# Altium PCB PCB1.PcbDoc (part 2 of 2)
Units mil, origin at the board's own origin, x right, y up, seen from the top; angles counter-clockwise.
Board outline 6000 x 4000 mil, 4 copper layers (Top Layer, Layer 1, Layer 2, Bottom Layer), stack 23.756 mil thick; 294 components, 275 nets, 1509 pads, 24 vias.
Unrouted connection lines stored in the file: 1089.
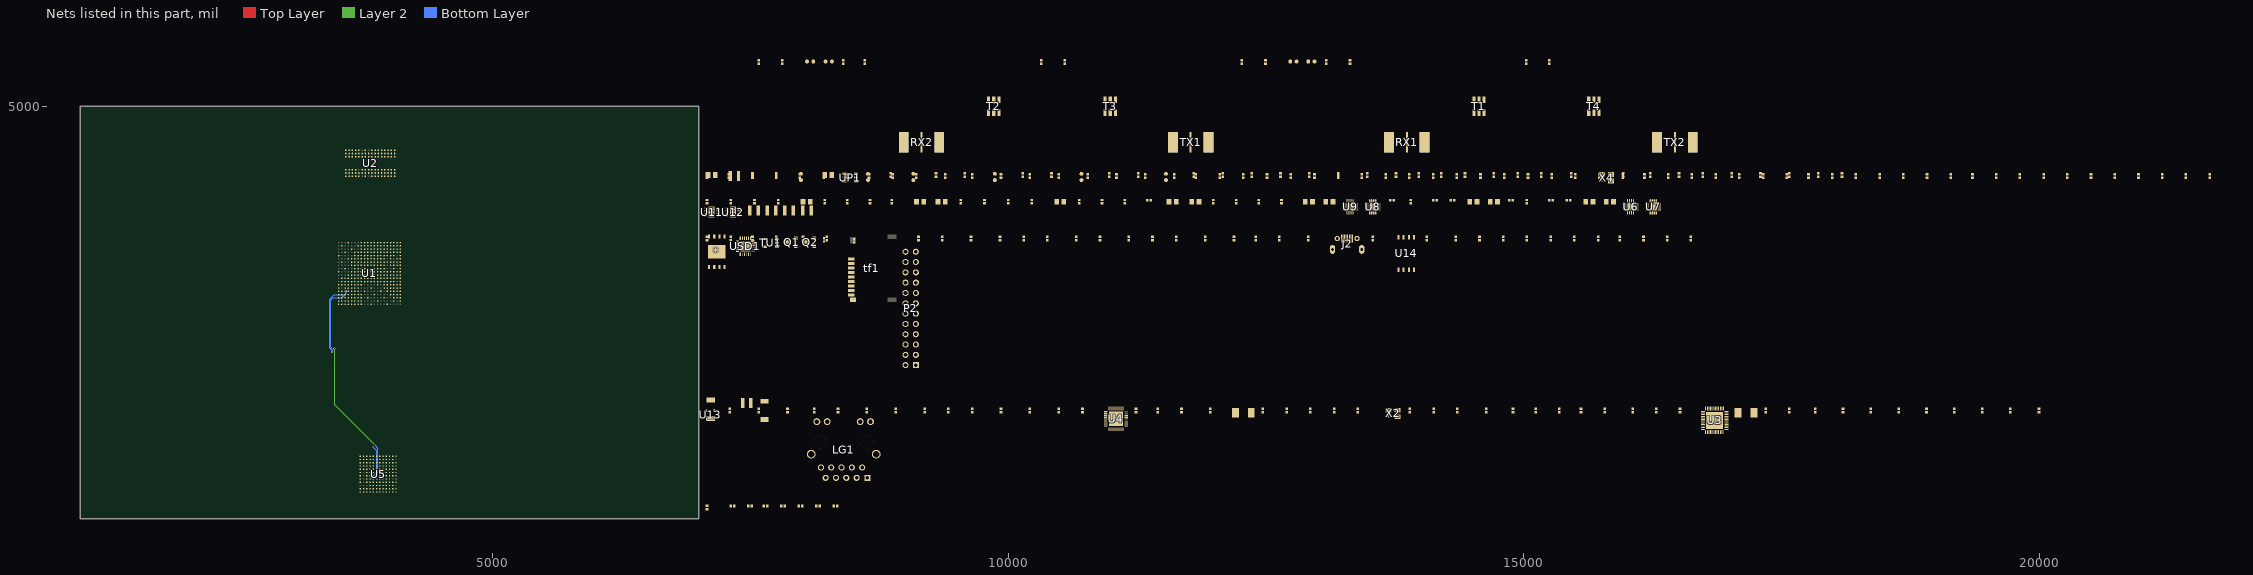
[diagram p3: the nets of this part, all layers, seen from the top]

## Part data
C1: library part CAP, "Capacitor"
C2 C3 C4 C5 C6 C7 C8 C9 C10 C11 C12 C13 C17 C18 C19 C20 C21 C22 C23 C24 C25 C26 C27 C28 C33 C34 C35 C36 C37 C38 C39 C41 C42 C43 C44 C45 C46 C49 C50 C51 C52 C53 C54 C55 C56 C57 C61 C62 C67 C68 C69 C70 C71 C72 C73 C74 C75 C76 C77 C78 C80 C81 C82 C83 C84 C85 C86 C87 C89 C90 C91 C92 C93 C94 C95 C96 C98 C99 C100 C101 C102 C103 C104 C105 C106 C107 C108: library part CAP_3, "Capacitor"
C14 C15 C16 C29 C30 C31 C32 C40 C47 C48 C117 C118 C122 C123 C145 C146 C150 C151 C152 C162 C165 C166 C168 C169 C170 C171 C172 C173 C174 C175 C176 C177 CP1 CP3: library part CAP_1, "Capacitor"
C58 C59 C60 C63 C109 C110 C111 C112 C113 C114 C115 C116 C119 C120 C121 C124 C125 C126 C127 C128 C129 C130 C131 C132 C133 C134 C135 C136 C137 C138 C139 C140 C141 C142 C143 C144 CP2: library part CAP_2, "Capacitor"
DONE USR_LED: library part LED0, "Typical INFRARED GaAs LED", LatestRevisionDate=08-Jul-2005, LatestRevisionNote="Mech Layer 1 removed.", PackageDescription="LED; 2 Leads", PackageReference=LED-0, Published=8-Jun-2000, Publisher="Altium Limited"
L1 L2 L3 L4 L6: library part INDUCTANCE_1, "Inductance"
L5 L7 L8 L9 LP1: library part INDUCTANCE, "Inductance"
LG1: BOM_Manufacturer=HANRUN, BOM_Manufacturer Part=HR911130C, BOM_Supplier=LCSC, BOM_Supplier Part=C50933, Contributor=LCSC, nameAlias=Value, spicePre=L, spiceSymbolName=HR911130C
P2: "Header, 12-Pin, Dual row", LatestRevisionDate=17-Jul-2002, LatestRevisionNote="Re-released for DXP Platform.", Publisher="Altium Limited"
Q1 Q2: PSpiceTemplate="X^@REFDES %d %g %s @MODEL"
R1 R2 R3 R4 R5 R6 R7 R8 R9 R10 R11 R12 R13 R14 R15 R16 R17 R18 R19 R20 R21 R22 R24 R25 R26 R27 R28 R29 R30 R31 R32 R33 R34 R35 R36 R37 R38 R39 R40 R41 R42 R43 R44 R45 R46 R47 R48 R49 R50 R51 R52 R53 R54 R55 R56 R57 R58 R59 R60 R61 R62 R63 R64 R65 R66 R67 R68 R69 R70 R71 R72: library part RES, "Resistor"
R73 R74 R75 RP1 RP2 RX4 RX5 RX6 RX7 RX8 RX10 RX13 RX14 RX15 RX22: library part RES_1, "Resistor"
RESET USR_BTN: "Switch", LatestRevisionDate=17-Jul-2002, LatestRevisionNote="Re-released for DXP Platform.", PackageDescription="Switch; 2 Leads", PackageReference=SPST-2, Published=24-Mar-1999, Publisher="Altium Limited"
U2: library part DDR3
U14: library part N25Q12-F8, "Serial Flash Memory, 16Mbit, Low Voltage, 50MHz SPI Bus Interface", Manufacturer=Spansion
X1 X3: library part XTAL-2, "Crystal"
X2 X4: library part XTAL-4, "Oscillator"

## Via types
v1: diameter 19.68, hole 11.81, Top Layer to Bottom Layer, 16 vias
v2: diameter 17.72, hole 7.87, Top Layer to Bottom Layer, tented both sides, 8 vias

## Nets (pads, with @x,y where several pads share a name; then routed paths per layer and width w, separated by ;. In a path a pad name is that pad's centre, name@x,y a point inside that pad or via, vN(x,y) a via of type N, cw(c..) or ccw(c..) an arc to the next point about the centre after c; other vN are vias at no path point)
1P3_TX: C58.1 C59.2 C60.1 C63.2 L5.1 L7.1 L8.1 L9.1 U5.A7 U5.A8 U5.A9 U5.A10
AD9361_CLKOUT: U1.W18 U5.J6
AD9361_RST: RX4.1 U1.R19 U5.K5
ADVDD10: C124.1 C125.1 C126.1 C127.2 C128.2 C130.2 C131.2 L6.2 U3.3 U3.9 U3.28 U3.36 U3.40
CB: *.6 R58.1 U14.6
CTRL_IN0: U5.C5
CTRL_IN1: U5.C6
CTRL_IN2: U5.D6
CTRL_IN3: U5.D5
CTRL_OUT0: U1.R16 U5.D4
CTRL_OUT1: U1.R17 U5.E4
CTRL_OUT2: U1.T17 U5.E5
CTRL_OUT3: U1.R18 U5.E6 | length 355.5
  Top Layer w5: v2(3827.76,1402.24) U5.E6@3843.51,1417.99
  Bottom Layer w5: v2(3827.76,1402.24) 3877.68,1452.16 3877.68,1661.82 v2(3840.21,1699.28)
CTRL_OUT4: U1.V17 U5.F6 | length 2120.4
  Top Layer w4: v2@3859.25,1402.24 U5.F6@3875,1417.99
  Top Layer w5: v2@3554.56,3159.56 U1.V17@3570.04,3175.04
  Layer 2 w10: v2(3468.48,2650.68) 3468.48,2108.02 v2(3857.68,1718.82)
  Bottom Layer w4: v2@3855.68,1716.82 3888.68,1683.82 3888.68,1433.82 3859.76,1404.9 v2(3859.76,1402.25)
  Bottom Layer w5: v2(3468.48,2650.68) 3441.48,2650.68 3428.98,2663.18 3428.98,2858.68 3430.48,2860.18 3430.48,3120.68 3452.54,3142.74 3537.92,3142.74 v2(3554.56,3159.38)
CTRL_OUT5: U1.U15 U5.F5 | length 760.4
  Top Layer w5: v2@3586.06,3222.55 U1.U15@3601.54,3238.03
  Bottom Layer w5: v2(3444.62,2618.68) 3443.98,2619.32 3443.98,2632.18 3420.48,2655.68 3420.48,3129.68 3465.48,3174.68 3561.48,3174.68 3586.06,3199.25 v2(3586.06,3222.37)
CTRL_OUT6: U1.T19 U5.F4
CTRL_OUT7: U1.V18 U5.G4
DATA_CLK_N: U1.U19 U5.H11
DATA_CLK_P: U1.U18 U5.G11
DDR3_A0: U1.N2 U2.N3
DDR3_A1: U1.K2 U2.P7
DDR3_A2: U1.M3 U2.P3
DDR3_A3: U1.K3 U2.N2
DDR3_A4: U1.M4 U2.P8
DDR3_A5: U1.L1 U2.P2
DDR3_A6: U1.L4 U2.R8
DDR3_A7: U1.K4 U2.R2
DDR3_A8: U1.K1 U2.T8
DDR3_A9: U1.J4 U2.R3
DDR3_A10: U1.F5 U2.L7
DDR3_A11: U1.G4 U2.R7
DDR3_A12: U1.E4 U2.N7
DDR3_A13: U1.D4 U2.T3
DDR3_A14: U1.F4 U2.T7
DDR3_BA0: U1.L5 U2.M2
DDR3_BA1: U1.R4 U2.N8
DDR3_BA2: U1.J5 U2.M3
DDR3_CAS: U1.P5 U2.K3
DDR3_CK_N: R20.2 U1.M2 U2.K7
DDR3_CK_P: R20.1 U1.L2 U2.J7
DDR3_CKE: U1.N3 U2.K9
DDR3_CS: U1.N1 U2.L2
DDR3_DM0: U1.A1 U2.E7
DDR3_DM1: U1.F1 U2.D3
DDR3_DQ0: U1.C3 U2.E3
DDR3_DQ1: U1.B3 U2.F7
DDR3_DQ2: U1.A2 U2.F2
DDR3_DQ3: U1.A4 U2.F8
DDR3_DQ4: U1.D3 U2.H3
DDR3_DQ5: U1.D1 U2.H8
DDR3_DQ6: U1.C1 U2.G2
DDR3_DQ7: U1.E1 U2.H7
DDR3_DQ8: U1.E2 U2.D7
DDR3_DQ9: U1.E3 U2.C3
DDR3_DQ10: U1.G3 U2.C8
DDR3_DQ11: U1.H3 U2.C2
DDR3_DQ12: U1.J3 U2.A7
DDR3_DQ13: U1.H2 U2.A2
DDR3_DQ14: U1.H1 U2.B8
DDR3_DQ15: U1.J1 U2.A3
DDR3_DQS0_N: U1.B2 U2.G3
DDR3_DQS0_P: U1.C2 U2.F3
DDR3_DQS1_N: U1.F2 U2.B7
DDR3_DQS1_P: U1.G2 U2.C7
DDR3_ODT: U1.N5 U2.K1
DDR3_RAS: U1.P4 U2.J3
DDR3_RESET: R1.1 U1.B4 U2.T2
DDR3_VREF: C1.1 R4.1 R5.2 U1.H6 U1.P6 U2.H1 U2.M8
DDR3_WE: U1.M5 U2.L3
EN_AGC: U1.W19 U5.G5
ENABLE: U1.V15 U5.G6
ETH_MDC: U1.C10 U3.30
ETH_MDIO: R34.2 U1.C11 U3.31
ETH_RXCK: U1.B17 U3.19
ETH_RXCTL: R36.2 U1.D13 U3.13
ETH_RXD0: R41.1 U1.D11 U3.14
ETH_RXD1: R39.1 U1.A16 U3.16
ETH_RXD2: R43.1 U1.F15 U3.17
ETH_RXD3: R45.1 U1.A15 U3.18
ETH_TXCK: U1.A19 U3.22
ETH_TXCTL: U1.F14 U3.27
ETH_TXD0: U1.E14 U3.23
ETH_TXD1: U1.B18 U3.24
ETH_TXD2: U1.D10 U3.25
ETH_TXD3: U1.A17 U3.26
FB_CLK_N: RX22.2 U1.U17 U5.G10
FB_CLK_P: U1.T16 U5.F10
FPGA_DONE: Q1.1 U1.R11
FPGA_TCK: P2.10 U1.F9
FPGA_TDI: P2.8 U1.G6
FPGA_TDO: P2.7 U1.F6
FPGA_TMS: P2.9 U1.J6
GND: *.4 *.9 C1.2 C2.1 C3.1 C4.1 C5.1 C6.1 C7.1 C8.1 C9.1 C10.1 C11.1 C12.1 C13.1 C33.1 C34.1 C35.1 C36.1 C37.1 C38.1 C39.1 C41.1 C42.1 C43.1 C44.1 C45.1 C46.1 C49.1 C50.1 C51.1 C52.1 C53.1 C54.1 C55.1 C56.1 C57.1 C61.1 C62.1 C67.1 C68.1 C69.1 C70.1 C71.1 C72.1 C73.1 C74.1 C75.1 C76.1 C77.1 C78.1 C80.1 C81.2 C82.1 C83.1 C84.1 C85.1 C86.1 C87.1 C89.1 C90.1 C91.1 C92.1 C93.1 C94.1 C95.1 C96.1 C98.2 C99.2 C100.2 C101.2 C102.2 C103.2 C104.2 C105.2 C106.2 C107.2 C108.2 C109.1 C110.1 C111.2 C112.2 C113.1 C114.1 C115.1 C116.1 C117.2 C118.2 C119.1 C120.2 C121.1 C122.2 C123.2 C124.2 C125.2 C126.2 C127.1 C128.1 C129.2 C130.1 C131.1 C132.2 C133.2 C134.2 C135.2 C136.2 C137.2 C138.2 C139.2 C140.1 C141.2 J2.5 J2.6 J2.7 J2.8 J2.9 LG1.12 LG1.P10 LG1.SHIELD0 LG1.SHIELD1 P2.3 P2.5 P2.18 P2.19 P2.20 P2.21 P2.22 P2.23 P2.24 Q1.2 Q2.2 R1.2 R2.1 R5.1 R6.2 R11.2 R12.2 R17.2 R18.2 R26.2 R28.2 R36.1 R40.1 R44.2 R49.1 R51.1 R53.1 R54.2 R56.1 R62.1 R65.2 R69.2 RESET.1 RX6.2 RX7.2 RX8.2 RX13.2 RX14.2 RX15.2 tf1.6 tf1.10 TU1.2 U1.A8 U1.A18 U1.B1 U1.B11 U1.C4 U1.C9 U1.C14 U1.D17 U1.E10 U1.E20 U1.F3 U1.F7 U1.F10 U1.G10 U1.G12 U1.G16 U1.H7 U1.H9 U1.H11 U1.H13 U1.H19 U1.J2 U1.J8 U1.J10 U1.J12 U1.K5 U1.K7 U1.K10 U1.K11 U1.K13 U1.K15 U1.L8 U1.L9 U1.L12 U1.L18 U1.M1 U1.M7 U1.M9 U1.M10 U1.M11 U1.M13 U1.N4 U1.N8 U1.N10 U1.N12 U1.N14 U1.P7 U1.P9 U1.P11 U1.P13 U1.P17 U1.R8 U1.R12 U1.R20 U1.T3 U1.T7 U1.T13 U1.U6 U1.U16 U1.V9 U1.V19 U1.W2 U1.W12 U1.Y5 U1.Y15 U2.A9 U2.B1 U2.B3 U2.B9 U2.D1 U2.D8 U2.E1 U2.E2 U2.E8 U2.F9 U2.G1 U2.G8 U2.G9 U2.J2 U2.J8 U2.M1 U2.M9 U2.P1 U2.P9 U2.T1 U2.T9 U3.0 U3.47 U4.0 U6.6 U6.7 U6.8 U6.15 U6.16 U6.20 U7.6 U7.7 U7.8 U7.15 U7.16 U7.20 U8.6 U8.7 U8.8 U8.15 U8.16 U8.20 U9.6 U9.7 U9.8 U9.15 U9.16 U9.20 U13.1 U14.4 USD1.2 USD1.11 USD1.25 USR_BTN.1 X2.2
NetC6_2: C6.2 U6.9
NetC7_2: C7.2 U7.9
NetC11_2: C11.2 U8.9
NetC13_2: C13.2 U9.9
NetC19_1: C19.1 R21.2 R24.1 U11.3
NetC24_1: C24.1 R22.2 R25.1 U12.3
NetC27_2: C27.2 U11.6
NetC28_2: C28.2 U12.6
NetC111_1: C111.1 C112.1 LG1.P1
NetC117_1: C117.1 U3.43 X1.1
NetC118_1: C118.1 U3.42 X1.2
NetC119_2: C119.2 R28.1 R29.1 U1.E11
NetC122_1: C122.1 U4.26 X3.1
NetC123_1: C123.1 U4.25 X3.2
NetC129_1: C129.1 U4.20
NetC135_1: C135.1 C136.1 R64.1
NetC142_1: C142.1 R73.2
NetC145_2: C145.2 R74.1
NetC146_2: C146.2 R73.1 U5.G2 U5.G3
NetC150_2: C150.2 C152.1 U5.M12
NetC151_2: C151.2 R74.2 U5.A11 U5.B11
NetC152_2: C152.2 X4.3
NetCP2_2: CP2.2 RP1.1 RP2.2 UP1.6
NetDONE_2: DONE.2 R61.2
NetL1_1: L1.1 U6.1 U6.2 U6.3
NetL2_1: L2.1 U7.1 U7.2 U7.3
NetL3_1: L3.1 U8.1 U8.2 U8.3
NetL4_1: L4.1 U9.1 U9.2 U9.3
NetLG1_11: LG1.11 R32.2
NetLG1_13: LG1.13 R31.2
NetLP1_1: LP1.1 UP1.3
NetP2_2: P2.2 R52.1 R54.1
NetP2_4: P2.4 R48.2 R50.1
NetQ1_3: Q1.3 R61.1
NetQ2_3: Q2.3 R60.1
NetR2_2: R2.2 U1.H5
NetR3_2: R3.2 U1.G5
NetR6_1: R6.1 U2.L8
NetR9_2: R9.2 R11.1 U6.5
NetR10_2: R10.2 R12.1 U7.5
NetR14_2: R14.2 R17.1 U8.5
NetR15_2: R15.2 U9.4
NetR16_2: R16.2 R18.1 U9.5
NetR26_1: R26.1 U3.39
NetR27_1: R27.1 U3.32
NetR30_2: R30.2 U1.B10
NetR37_2: R37.2 X2.3
NetR38_2: R38.2 U3.20
NetR42_2: R42.2 U4.1
NetR44_1: R44.1 U4.24
NetR55_2: R55.2 U1.R10
NetR57_2: R57.2 U1.L6
NetR60_2: R60.2 USR_LED.2
NetR62_2: R62.2 USD1.24
NetR63_2: R63.2 tf1.3 USD1.20
NetR67_2: R67.2 TU1.1
NetR68_1: R68.1 TU1.3
NetR70_1: R70.1 tf1.9
NetR72_1: R72.1 USD1.9
NetR75_1: R75.1 U5.L4
NetRESET_2: RESET.2 U13.3
NetRX1_1: RX1.1 T1.3
NetRX2_1: RX2.1 T2.3
NetT3_3: T3.3 TX1.1
NetT4_3: T4.3 TX2.1
Nettf1_1: tf1.1 USD1.23
Nettf1_2: tf1.2 USD1.22
Nettf1_5: tf1.5 USD1.19
Nettf1_7: tf1.7 USD1.18
Nettf1_8: tf1.8 USD1.16
OTG_CLK: R42.1 U1.A11
OTG_DATA0: U1.A14 U4.3
OTG_DATA1: U1.D15 U4.4
OTG_DATA2: U1.A12 U4.5
OTG_DATA3: U1.F12 U4.6
OTG_DATA4: U1.C16 U4.7
OTG_DATA5: U1.A10 U4.9
OTG_DATA6: U1.E13 U4.10
OTG_DATA7: U1.C18 U4.13
OTG_DIR: U1.C13 U4.31
OTG_NXT: U1.E16 U4.2
OTG_RESETN: C121.2 R33.1 U1.D16 U4.27
OTG_STP: U1.C15 U4.29
PG_1V0: R7.2 U6.4 U7.13
PG_1V5: R13.2 U8.4 U9.13
PG_1V8: R8.2 U7.4 U8.13
PHY_AD0/LED0: R31.1 R46.2 U3.35
PHY_AD1/LED1: R32.1 R40.2 U3.34
PHY_MDI0_N: LG1.P3 U3.2
PHY_MDI0_P: LG1.P2 U3.1
PHY_MDI1_N: LG1.P7 U3.5
PHY_MDI1_P: LG1.P4 U3.4
PHY_MDI2_N: LG1.P6 U3.8
PHY_MDI2_P: LG1.P5 U3.7
PHY_MDI3_N: LG1.P9 U3.11
PHY_MDI3_P: LG1.P8 U3.10
PMEB: R35.2 U3.33
PS_CLK_500: R37.1 U1.E7
PS_MIO7: R56.2 U1.D8
PS_MIO8: R47.2 U1.D5
PS_PRO_B: U1.C7 U3.29 U13.2
QSPI_CS: *.1 R59.1 U1.A7 U14.1
QSPI_D0: *.5 R49.2 U1.B8 U14.5
QSPI_D1: *.2 R51.2 U1.D6 U14.2
QSPI_D2: *.3 R52.2 U1.B7 U14.3
QSPI_D3: *.7 R50.2 U1.A6 U14.7
QSPI_SCK: R53.2 R58.2 U1.A5
REG_OUT: L6.1 U3.48
RFGND: C14.2 C15.2 C17.1 C18.1 C20.1 C21.1 C22.1 C23.1 C25.1 C26.1 C27.1 C28.1 C58.2 C59.1 C60.2 C63.1 C142.2 C143.1 C144.1 C145.1 C146.1 C150.1 C151.1 C162.2 C165.2 C166.2 C168.2 C169.2 C170.2 C171.2 C172.2 C173.2 C174.2 C175.2 C176.2 C177.2 CP1.1 CP3.1 R24.2 R25.2 R75.2 RP1.2 RX1.2 RX1.3 RX1.4 RX1.5 RX2.2 RX2.3 RX2.4 RX2.5 RX5.1 RX6.1 RX7.1 RX8.1 RX10.1 RX13.1 RX14.1 RX15.1 RX22.1 T1.1 T1.2 T1.5 T2.1 T2.2 T2.5 T3.1 T3.2 T3.5 T4.1 T4.2 T4.5 TX1.2 TX1.3 TX1.4 TX1.5 TX2.2 TX2.3 TX2.4 TX2.5 U5.A1 U5.A2 U5.A4 U5.A5 U5.A6 U5.A12 U5.B1 U5.B2 U5.B12 U5.C1 U5.C2 U5.C7 U5.C8 U5.C9 U5.C10 U5.C11 U5.C12 U5.D1 U5.D12 U5.E1 U5.F1 U5.F3 U5.F7 U5.F9 U5.F11 U5.G1 U5.G12 U5.H2 U5.H3 U5.H5 U5.H6 U5.H7 U5.H10 U5.J2 U5.K1 U5.K2 U5.K12 U5.L1 U5.L2 U5.L3 U5.L7 U5.L8 U5.L9 U5.L10 U5.L11 U5.L12 U5.M4 U5.M5 U5.M6 U11.0 U11.4 U12.0 U12.4 UP1.2 X4.2
  other v1: 7112.2,3936.61 7137.8,3936.61 7317.2,3936.61 7342.8,3936.61 7112.2,3962.2 7137.8,3962.2 7317.2,3962.2 7342.8,3962.2 7112.2,3987.8 7137.8,3987.8 7317.2,3987.8 7342.8,3987.8 7112.2,4013.39 7137.8,4013.39 7317.2,4013.39 7342.8,4013.39
RX1A_N: C16.2 U5.M2
RX1A_P: C30.2 U5.M1
RX1AN_N: C16.1 T1.6
RX1AN_P: C30.1 T1.4
RX1B_N: C29.2 U5.J1
RX1B_P: C31.2 U5.H1
RX1BN_N: C29.1 T2.6
RX1BN_P: C31.1 T2.4
RX_D0_N: U1.P20 U5.K11
RX_D0_P: U1.N20 U5.J12
RX_D1_N: U1.W20 U5.K10
RX_D1_P: U1.V20 U5.J11
RX_D2_N: U1.U20 U5.K9
RX_D2_P: U1.T20 U5.J10
RX_D3_N: U1.P19 U5.K8
RX_D3_P: U1.N18 U5.J9
RX_D4_N: U1.T15 U5.K7
RX_D4_P: U1.T14 U5.J8
RX_D5_N: U1.R14 U5.J7
RX_D5_P: U1.P14 U5.H8
RX_FRAME_N: U1.V13 U5.G7
RX_FRAME_P: U1.U13 U5.G8
SD_CD: R70.2 R71.1 U1.B14
SD_CLK: R72.2 U1.D14
SD_CMD: U1.C17 USD1.4
SD_D0: U1.E12 USD1.6
SD_D1: U1.A9 USD1.7
SD_D2: U1.F13 USD1.1
SD_D3: U1.B15 USD1.3
SPI_CLK: U1.P18 U5.J5
SPI_DI: U1.P15 U5.J4
SPI_DO: U1.P16 U5.L6
SPI_ENB: U1.N17 U5.K6
TEST/ENABLE: RX5.2 U5.C4
TX1A_N: C48.1 L9.2 U5.M8
TX1A_P: C40.1 L8.2 U5.M7
TX1B_N: C47.1 L7.2 U5.M10
TX1B_P: C32.1 L5.2 U5.M9
TX1BN_N: C47.2 C48.2 T3.6 T4.6
TX1BN_P: C32.2 C40.2 T3.4 T4.4
TX_D0_N: U1.T10 U5.E7
TX_D0_P: U1.T11 U5.F8
TX_D1_N: U1.Y17 U5.D7
TX_D1_P: U1.Y16 U5.E8
TX_D2_N: U1.U12 U5.D8
TX_D2_P: U1.T12 U5.E9
TX_D3_N: U1.Y19 U5.D9
TX_D3_P: U1.Y18 U5.E10
TX_D4_N: U1.W13 U5.D10
TX_D4_P: U1.V12 U5.E11
TX_D5_N: U1.Y14 U5.D11
TX_D5_P: U1.W14 U5.E12
TX_FRAME_N: RX10.2 U1.W16 U5.H9
TX_FRAME_P: U1.V16 U5.G9
TXNRX: U1.U14 U5.H4
UART_RX: P2.11 U1.C12
UART_TX: P2.12 U1.B12
USB2_5V: C137.1 J2.1 P2.15 R64.2 R66.1 R67.1
USB_ID: J2.4 U4.23
USB_OTG_N: J2.2 P2.16 U4.19
USB_OTG_P: J2.3 P2.17 U4.18
USB_VBUS: R66.2 U4.22
USR_BTN: R19.2 U1.C5 USR_BTN.2
USR_LED: Q2.1 R65.1 U1.C8
VCC1P8: C143.2 C144.2 CP2.1 CP3.2 LP1.2 RP2.1 U5.H12 X4.4
VCC_1V0: C2.2 C33.2 C34.2 C35.2 C36.2 C37.2 C39.2 C49.2 C50.2 C51.2 C52.2 C53.2 C54.2 C55.2 C56.2 C57.2 C67.2 L1.2 R7.1 R9.1 U1.G7 U1.G11 U1.G13 U1.H10 U1.H12 U1.J7 U1.J13 U1.K12 U1.L7 U1.L13 U1.M12 U1.N7 U1.N13 U1.P8 U1.P12 U1.R7 U1.R13 U6.14
VCC_1V5: C8.2 C38.2 C81.1 C86.2 C98.1 C99.1 C100.1 C101.1 C102.1 C103.1 C104.1 C105.1 C106.1 C107.1 C108.1 L3.2 R3.1 R4.2 R13.1 R14.1 U1.A3 U1.D2 U1.E5 U1.G1 U1.H4 U1.L3 U1.P2 U1.R5 U1.U1 U1.V4 U2.A1 U2.A8 U2.B2 U2.C1 U2.C9 U2.D2 U2.D9 U2.E9 U2.F1 U2.G7 U2.H2 U2.H9 U2.K2 U2.K8 U2.N1 U2.N9 U2.R1 U2.R9 U8.14
VCC_1V8: C3.2 C41.2 C42.2 C43.2 C44.2 C45.2 C46.2 C68.2 C69.2 C70.2 C71.2 C72.2 C73.2 C74.2 C80.2 C82.2 C83.2 C84.2 C85.2 C90.2 C91.2 C92.2 C93.2 C94.2 C95.2 C96.2 C109.2 C110.2 C141.1 L2.2 R8.1 R10.1 R29.2 R30.1 R33.2 R34.1 R39.2 R41.2 R43.2 R45.2 R71.2 U1.A13 U1.B16 U1.C19 U1.D12 U1.E15 U1.F8 U1.F11 U1.F18 U1.G8 U1.G9 U1.H8 U1.H14 U1.J9 U1.J11 U1.J17 U1.K8 U1.K20 U1.L11 U1.M8 U1.M16 U1.N9 U1.N11 U1.N19 U1.P10 U1.R9 U1.R15 U1.T8 U1.T18 U1.U11 U1.V14 U1.W7 U1.W17 U1.Y10 U1.Y20 U3.15 U3.21 U4.8 U4.11 U4.14 U4.28 U4.30 U4.32 U7.14 USD1.5
VCC_3V3: *.8 C9.2 C20.2 C21.2 C25.2 C26.2 C61.2 C62.2 C75.2 C76.2 C77.2 C78.2 C87.2 C89.2 C113.2 C114.2 C115.2 C116.2 C120.1 C132.1 C133.1 C134.1 C138.1 C139.1 CP1.2 DONE.1 L4.2 LG1.14 P2.1 P2.6 R15.1 R16.1 R19.1 R27.2 R35.1 R38.1 R46.1 R47.1 R48.1 R55.1 R57.1 R59.2 R63.1 R68.2 tf1.4 U1.B6 U1.D7 U1.K6 U1.M6 U1.N6 U1.R6 U1.T6 U3.6 U3.37 U3.38 U3.41 U3.44 U3.45 U4.21 U9.14 U11.5 U11.7 U11.8 U12.5 U12.7 U12.8 U13.4 U14.8 UP1.1 UP1.4 USD1.17 USD1.21 USR_LED.1 X2.1 X2.4
VCC_IN: C4.2 C5.2 C10.2 C12.2 C140.2 P2.13 P2.14 TU1.5 U6.10 U6.11 U6.12 U6.13 U7.10 U7.11 U7.12 U8.10 U8.11 U8.12 U9.10 U9.11 U9.12
VDD_DIG: C14.1 C15.1 C22.2 C23.2 C24.2 C162.1 C172.1 C173.1 C176.1 C177.1 R22.1 RX4.2 U5.B8 U5.D2 U5.D3 U5.E3 U5.F12 U5.K4 U12.1 U12.2
VDDA_RX_LO: C17.2 C18.2 C19.2 C165.1 C166.1 C168.1 C169.1 C170.1 C171.1 C174.1 C175.1 R21.1 U5.B9 U5.B10 U5.E2 U5.F2 U5.J3 U5.K3 U11.1 U11.2
VUSB_V_EN: R69.1 TU1.4 U4.17
pads on no net: LG1. tf1.0 tf1.11 tf1.12 U1.A20 U1.B5 U1.B9 U1.B13 U1.B19 U1.B20 U1.C6 U1.C20 U1.D9 U1.D18 U1.D19 U1.D20 U1.E6 U1.E8 U1.E9 U1.E17 U1.E18 U1.E19 U1.F16 U1.F17 U1.F19 U1.F20 U1.G14 U1.G15 U1.G17 U1.G18 U1.G19 U1.G20 U1.H15 U1.H16 U1.H17 U1.H18 U1.H20 U1.J14 U1.J15 U1.J16 U1.J18 U1.J19 U1.J20 U1.K9 U1.K14 U1.K16 U1.K17 U1.K18 U1.K19 U1.L10 U1.L14 U1.L15 U1.L16 U1.L17 U1.L19 U1.L20 U1.M14 U1.M15 U1.M17 U1.M18 U1.M19 U1.M20 U1.N15 U1.N16 U1.P1 U1.P3 U1.R1 U1.R2 U1.R3 U1.T1 U1.T2 U1.T4 U1.T5 U1.T9 U1.U2 U1.U3 U1.U4 U1.U5 U1.U7 U1.U8 U1.U9 U1.U10 U1.V1 U1.V2 U1.V3 U1.V5 U1.V6 U1.V7 U1.V8 U1.V10 U1.V11 U1.W1 U1.W3 U1.W4 U1.W5 U1.W6 U1.W8 U1.W9 U1.W10 U1.W11 U1.W15 U1.Y1 U1.Y2 U1.Y3 U1.Y4 U1.Y6 U1.Y7 U1.Y8 U1.Y9 U1.Y11 U1.Y12 U1.Y13 U2.J1 U2.J9 U2.L1 U2.L9 U2.M7 U3.12 U3.46 U4.12 U4.15 U4.16 U5.A3 U5.B3 U5.B4 U5.B5 U5.B6 U5.B7 U5.C3 U5.L5 U5.M3 U5.M11 UP1.5 USD1.8 USD1.10 USD1.12 USD1.13 USD1.14 USD1.15 X4.1

## Text inside footprints (layer, text, board x,y; h text height)
DONE: Top Overlay "+" at 8267,3639.14 h30 r90
P2: Top Overlay "1" at 9145,2390 h50 r90; Top Overlay "13" at 9025,2350 h50 r90; Top Overlay "12" at 9125,3650 h50 r90; Top Overlay "24" at 9025,3650 h50 r90
RX1: Mechanical 37 "2" at 13708.15,4659.52 h30 r90; Mechanical 37 "3" at 13708.15,4659.52 h30 r90; Mechanical 37 "4" at 14048.67,4664.74 h30 r90; Mechanical 37 "5" at 14048.67,4664.74 h30 r90; Mechanical 37 "1" at 13877.67,4663.27 h30 r90; Mechanical 39 "200X95B" at 14281.67,4774.5 h30 r90; Mechanical 39 "200X95" at 14221.67,4758.5 h30 r90; Mechanical 39 "200X90" at 14161.67,4758.5 h30 r90; Mechanical 39 "CNSMARAL687W375H171" at 13551.67,4966.5 h30 r90; Top Component Outline "ADI/JRBL" at 13865,4582.03 h30 r180; Top Component Outline "25JUL16" at 13865,4609.63 h30 r180; Top Component Outline "QA/RGS" at 13865,5377.24 h30 r180; Top Component Outline "26JUL16" at 13865,5429.64 h30 r180; Mechanical 43 "PCB EDGE" at 14225,5136.5 h30 r90; Top Assembly "UPN" at 13865,4759.9 h30 r180; Top Assembly "N/A" at 13865,4720.5 h30 r180
RX2: Mechanical 37 "2" at 9003.15,4659.52 h30 r90; Mechanical 37 "3" at 9003.15,4659.52 h30 r90; Mechanical 37 "4" at 9343.67,4664.74 h30 r90; Mechanical 37 "5" at 9343.67,4664.74 h30 r90; Mechanical 37 "1" at 9172.67,4663.27 h30 r90; Mechanical 39 "200X95B" at 9576.67,4774.5 h30 r90; Mechanical 39 "200X95" at 9516.67,4758.5 h30 r90; Mechanical 39 "200X90" at 9456.67,4758.5 h30 r90; Mechanical 39 "CNSMARAL687W375H171" at 8846.67,4966.5 h30 r90; Top Component Outline "ADI/JRBL" at 9160,4582.03 h30 r180; Top Component Outline "25JUL16" at 9160,4609.63 h30 r180; Top Component Outline "QA/RGS" at 9160,5377.24 h30 r180; Top Component Outline "26JUL16" at 9160,5429.64 h30 r180; Mechanical 43 "PCB EDGE" at 9520,5136.5 h30 r90; Top Assembly "UPN" at 9160,4759.9 h30 r180; Top Assembly "N/A" at 9160,4720.5 h30 r180
T1: Mechanical 37 "3" at 14615,5072.5 h30; Mechanical 37 "6" at 14515,4947.5 h30; Mechanical 37 "4" at 14615,4947.5 h30; Mechanical 37 "1" at 14515,5072.51 h30; Mechanical 37 "5" at 14565,4947.51 h30; Mechanical 37 "2" at 14564.99,5072.51 h30; Mechanical 39 "30X65" at 14565,4905.02 h30; Mechanical 39 "TSML150W160H160" at 14565,5440 h30; Top Component Outline "ADI/JSM" at 14365,5086.81 h30 r90; Top Component Outline "04SEP12" at 14414.99,5086.81 h30 r90; Top Component Outline "QA/REP" at 14739.99,5074.41 h30 r90; Top Component Outline "04SEP12" at 14790,5086.81 h30 r90; Top Assembly "N/A" at 14615,5030.01 h30 r90; Top Assembly "UPN" at 14639.99,5030.01 h30 r90
T2: Mechanical 37 "3" at 9910,5072.5 h30; Mechanical 37 "6" at 9810,4947.5 h30; Mechanical 37 "4" at 9910,4947.5 h30; Mechanical 37 "1" at 9810,5072.51 h30; Mechanical 37 "5" at 9860,4947.51 h30; Mechanical 37 "2" at 9859.99,5072.51 h30; Mechanical 39 "30X65" at 9860,4905.02 h30; Mechanical 39 "TSML150W160H160" at 9860,5440 h30; Top Component Outline "ADI/JSM" at 9660,5086.81 h30 r90; Top Component Outline "04SEP12" at 9709.99,5086.81 h30 r90; Top Component Outline "QA/REP" at 10034.99,5074.41 h30 r90; Top Component Outline "04SEP12" at 10085,5086.81 h30 r90; Top Assembly "N/A" at 9910,5030.01 h30 r90; Top Assembly "UPN" at 9934.99,5030.01 h30 r90
T3: Mechanical 37 "3" at 11040,5072.5 h30; Mechanical 37 "6" at 10940,4947.5 h30; Mechanical 37 "4" at 11040,4947.5 h30; Mechanical 37 "1" at 10940,5072.51 h30; Mechanical 37 "5" at 10990,4947.51 h30; Mechanical 37 "2" at 10989.99,5072.51 h30; Mechanical 39 "30X65" at 10990,4905.02 h30; Mechanical 39 "TSML150W160H160" at 10990,5440 h30; Top Component Outline "ADI/JSM" at 10790,5086.81 h30 r90; Top Component Outline "04SEP12" at 10839.99,5086.81 h30 r90; Top Component Outline "QA/REP" at 11164.99,5074.41 h30 r90; Top Component Outline "04SEP12" at 11215,5086.81 h30 r90; Top Assembly "N/A" at 11040,5030.01 h30 r90; Top Assembly "UPN" at 11064.99,5030.01 h30 r90
T4: Mechanical 37 "3" at 15730,5072.5 h30; Mechanical 37 "6" at 15630,4947.5 h30; Mechanical 37 "4" at 15730,4947.5 h30; Mechanical 37 "1" at 15630,5072.51 h30; Mechanical 37 "5" at 15680,4947.51 h30; Mechanical 37 "2" at 15679.99,5072.51 h30; Mechanical 39 "30X65" at 15680,4905.02 h30; Mechanical 39 "TSML150W160H160" at 15680,5440 h30; Top Component Outline "ADI/JSM" at 15480,5086.81 h30 r90; Top Component Outline "04SEP12" at 15529.99,5086.81 h30 r90; Top Component Outline "QA/REP" at 15854.99,5074.41 h30 r90; Top Component Outline "04SEP12" at 15905,5086.81 h30 r90; Top Assembly "N/A" at 15730,5030.01 h30 r90; Top Assembly "UPN" at 15754.99,5030.01 h30 r90
TX1: Mechanical 37 "2" at 11613.15,4659.52 h30 r90; Mechanical 37 "3" at 11613.15,4659.52 h30 r90; Mechanical 37 "4" at 11953.67,4664.74 h30 r90; Mechanical 37 "5" at 11953.67,4664.74 h30 r90; Mechanical 37 "1" at 11782.67,4663.27 h30 r90; Mechanical 39 "200X95B" at 12186.67,4774.5 h30 r90; Mechanical 39 "200X95" at 12126.67,4758.5 h30 r90; Mechanical 39 "200X90" at 12066.67,4758.5 h30 r90; Mechanical 39 "CNSMARAL687W375H171" at 11456.67,4966.5 h30 r90; Top Component Outline "ADI/JRBL" at 11770,4582.03 h30 r180; Top Component Outline "25JUL16" at 11770,4609.63 h30 r180; Top Component Outline "QA/RGS" at 11770,5377.24 h30 r180; Top Component Outline "26JUL16" at 11770,5429.64 h30 r180; Mechanical 43 "PCB EDGE" at 12130,5136.5 h30 r90; Top Assembly "UPN" at 11770,4759.9 h30 r180; Top Assembly "N/A" at 11770,4720.5 h30 r180
TX2: Mechanical 37 "2" at 16308.15,4659.52 h30 r90; Mechanical 37 "3" at 16308.15,4659.52 h30 r90; Mechanical 37 "4" at 16648.67,4664.74 h30 r90; Mechanical 37 "5" at 16648.67,4664.74 h30 r90; Mechanical 37 "1" at 16477.67,4663.27 h30 r90; Mechanical 39 "200X95B" at 16881.67,4774.5 h30 r90; Mechanical 39 "200X95" at 16821.67,4758.5 h30 r90; Mechanical 39 "200X90" at 16761.67,4758.5 h30 r90; Mechanical 39 "CNSMARAL687W375H171" at 16151.67,4966.5 h30 r90; Top Component Outline "ADI/JRBL" at 16465,4582.03 h30 r180; Top Component Outline "25JUL16" at 16465,4609.63 h30 r180; Top Component Outline "QA/RGS" at 16465,5377.24 h30 r180; Top Component Outline "26JUL16" at 16465,5429.64 h30 r180; Mechanical 43 "PCB EDGE" at 16825,5136.5 h30 r90; Top Assembly "UPN" at 16465,4759.9 h30 r180; Top Assembly "N/A" at 16465,4720.5 h30 r180
U5: Top Overlay "A" at 3710.03,1214.52 h30 r270; Top Overlay "1" at 3665.03,1250.52 h30
U6: Bottom Component Center "7" at 16101.9,4034.3 h30; Bottom Component Center "8" at 16101.9,4054 h30; Bottom Component Center "6" at 16101.9,4014.7 h30; Bottom Component Center "5" at 16101.9,3995 h30; Bottom Component Center "13" at 15994.5,4054 h30; Bottom Component Center "10" at 16062.4,4082.6 h30; Bottom Component Center "11" at 16042.8,4082.6 h30; Bottom Component Center "12" at 16023.1,4082.6 h30; Bottom Component Center "14" at 15994.5,4034.3 h30; Bottom Component Center "9" at 16073.3,4082.6 h30; Bottom Component Center "4" at 16073.3,3966.4 h30; Bottom Component Center "3" at 16053.6,3966.4 h30; Bottom Component Center "2" at 16034,3966.4 h30; Bottom Component Center "1" at 16014.3,3966.4 h30; Bottom Component Center "20" at 16052.6,4024.5 h30; Bottom Component Center "15" at 15994.5,4014.7 h30; Bottom Component Center "16" at 15994.5,3995 h30
U7: Bottom Component Center "7" at 16321.9,4034.3 h30; Bottom Component Center "8" at 16321.9,4054 h30; Bottom Component Center "6" at 16321.9,4014.7 h30; Bottom Component Center "5" at 16321.9,3995 h30; Bottom Component Center "13" at 16214.5,4054 h30; Bottom Component Center "10" at 16282.4,4082.6 h30; Bottom Component Center "11" at 16262.8,4082.6 h30; Bottom Component Center "12" at 16243.1,4082.6 h30; Bottom Component Center "14" at 16214.5,4034.3 h30; Bottom Component Center "9" at 16293.3,4082.6 h30; Bottom Component Center "4" at 16293.3,3966.4 h30; Bottom Component Center "3" at 16273.6,3966.4 h30; Bottom Component Center "2" at 16254,3966.4 h30; Bottom Component Center "1" at 16234.3,3966.4 h30; Bottom Component Center "20" at 16272.6,4024.5 h30; Bottom Component Center "15" at 16214.5,4014.7 h30; Bottom Component Center "16" at 16214.5,3995 h30
U8: Bottom Component Center "7" at 13601.9,4034.3 h30; Bottom Component Center "8" at 13601.9,4054 h30; Bottom Component Center "6" at 13601.9,4014.7 h30; Bottom Component Center "5" at 13601.9,3995 h30; Bottom Component Center "13" at 13494.5,4054 h30; Bottom Component Center "10" at 13562.4,4082.6 h30; Bottom Component Center "11" at 13542.8,4082.6 h30; Bottom Component Center "12" at 13523.1,4082.6 h30; Bottom Component Center "14" at 13494.5,4034.3 h30; Bottom Component Center "9" at 13573.3,4082.6 h30; Bottom Component Center "4" at 13573.3,3966.4 h30; Bottom Component Center "3" at 13553.6,3966.4 h30; Bottom Component Center "2" at 13534,3966.4 h30; Bottom Component Center "1" at 13514.3,3966.4 h30; Bottom Component Center "20" at 13552.6,4024.5 h30; Bottom Component Center "15" at 13494.5,4014.7 h30; Bottom Component Center "16" at 13494.5,3995 h30
U9: Bottom Component Center "7" at 13381.9,4034.3 h30; Bottom Component Center "8" at 13381.9,4054 h30; Bottom Component Center "6" at 13381.9,4014.7 h30; Bottom Component Center "5" at 13381.9,3995 h30; Bottom Component Center "13" at 13274.5,4054 h30; Bottom Component Center "10" at 13342.4,4082.6 h30; Bottom Component Center "11" at 13322.8,4082.6 h30; Bottom Component Center "12" at 13303.1,4082.6 h30; Bottom Component Center "14" at 13274.5,4034.3 h30; Bottom Component Center "9" at 13353.3,4082.6 h30; Bottom Component Center "4" at 13353.3,3966.4 h30; Bottom Component Center "3" at 13333.6,3966.4 h30; Bottom Component Center "2" at 13314,3966.4 h30; Bottom Component Center "1" at 13294.3,3966.4 h30; Bottom Component Center "20" at 13332.6,4024.5 h30; Bottom Component Center "15" at 13274.5,4014.7 h30; Bottom Component Center "16" at 13274.5,3995 h30
U13: Bottom Component Center "2" at 7149,1977.5 h30; Bottom Component Center "1" at 7074,1977.5 h30; Bottom Component Center "4" at 7074,2060.1 h30; Bottom Component Center "3" at 7149,2060.1 h30
U14: Bottom Component Center "5" at 13935,3739.95 h30 r90; Bottom Component Center "2" at 13835,3424.95 h30 r90; Bottom Component Center "1" at 13785,3424.95 h30 r90; Bottom Component Center "4" at 13935,3424.95 h30 r90; Bottom Component Center "8" at 13785,3739.95 h30 r90; Bottom Component Center "7" at 13835,3739.95 h30 r90; Bottom Component Center "3" at 13885,3424.95 h30 r90; Bottom Component Center "6" at 13885,3739.95 h30 r90
USR_LED: Top Overlay "+" at 8557,3629.14 h30 r90